# EAGLE board v0.3 (EAGLE 9.3.2)
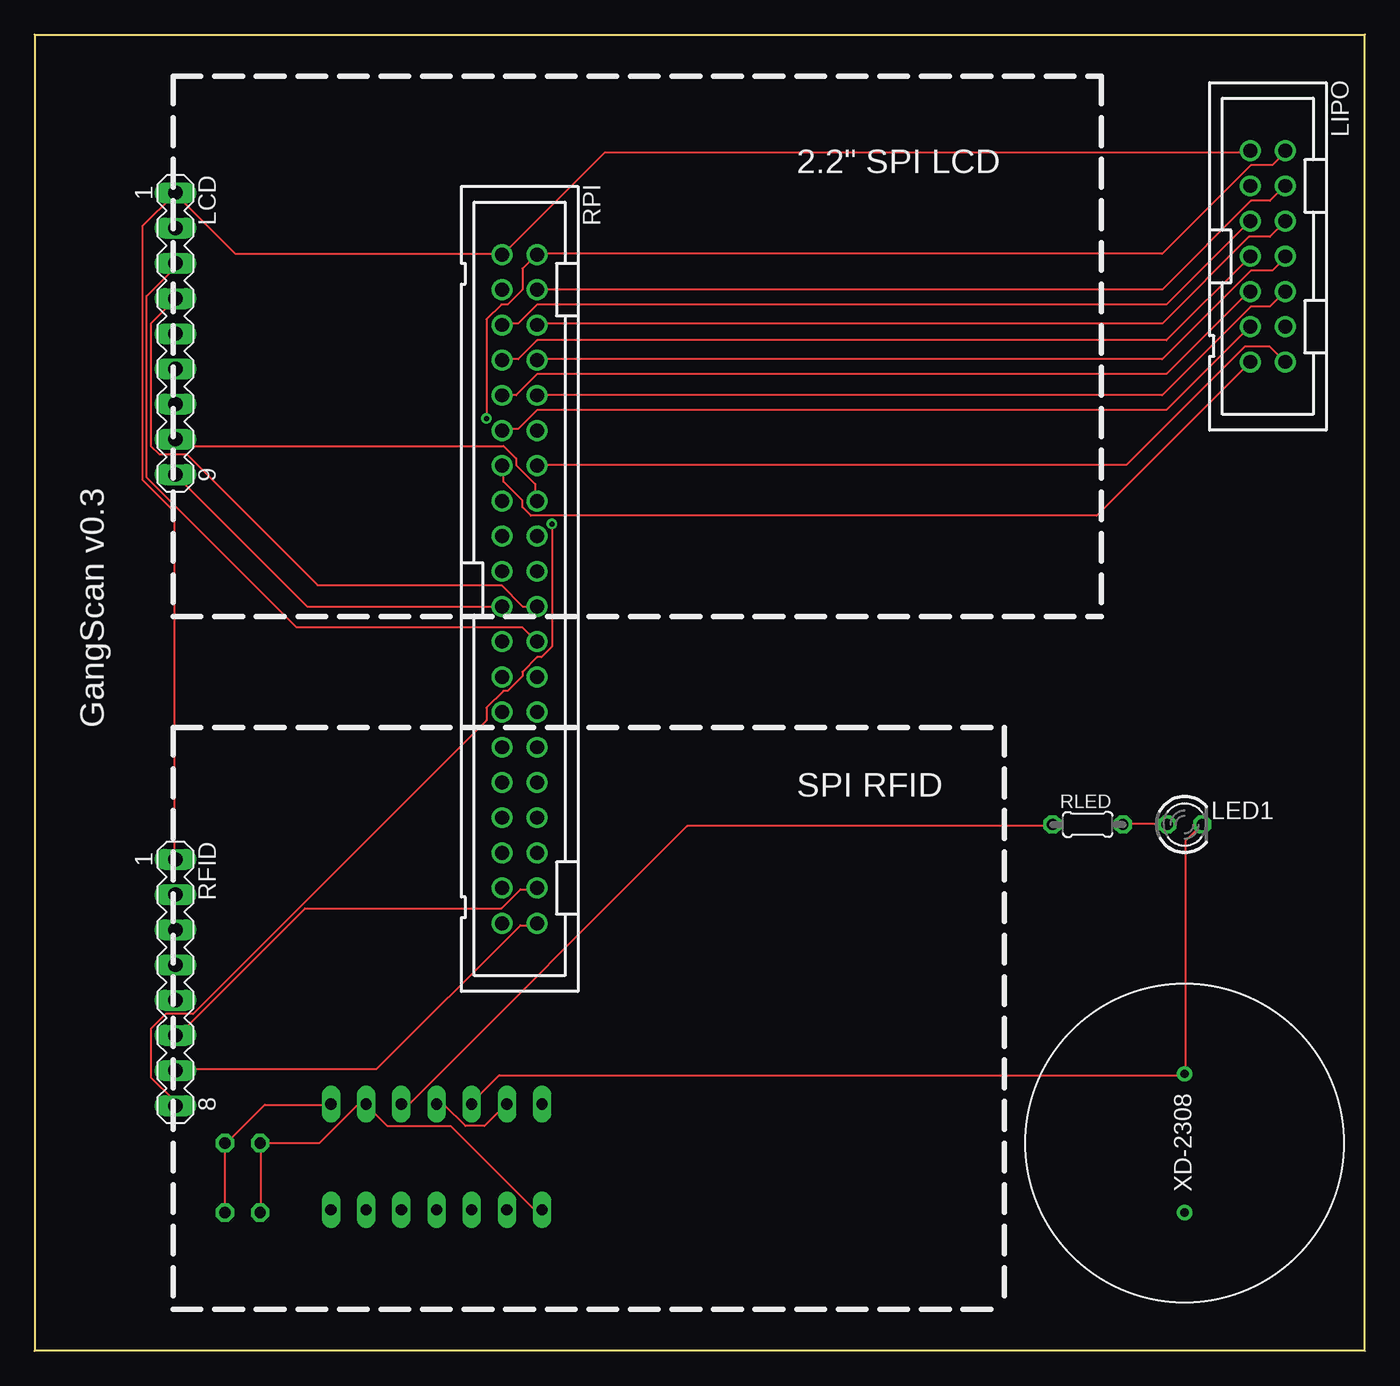
[diagram p0: board, top side]
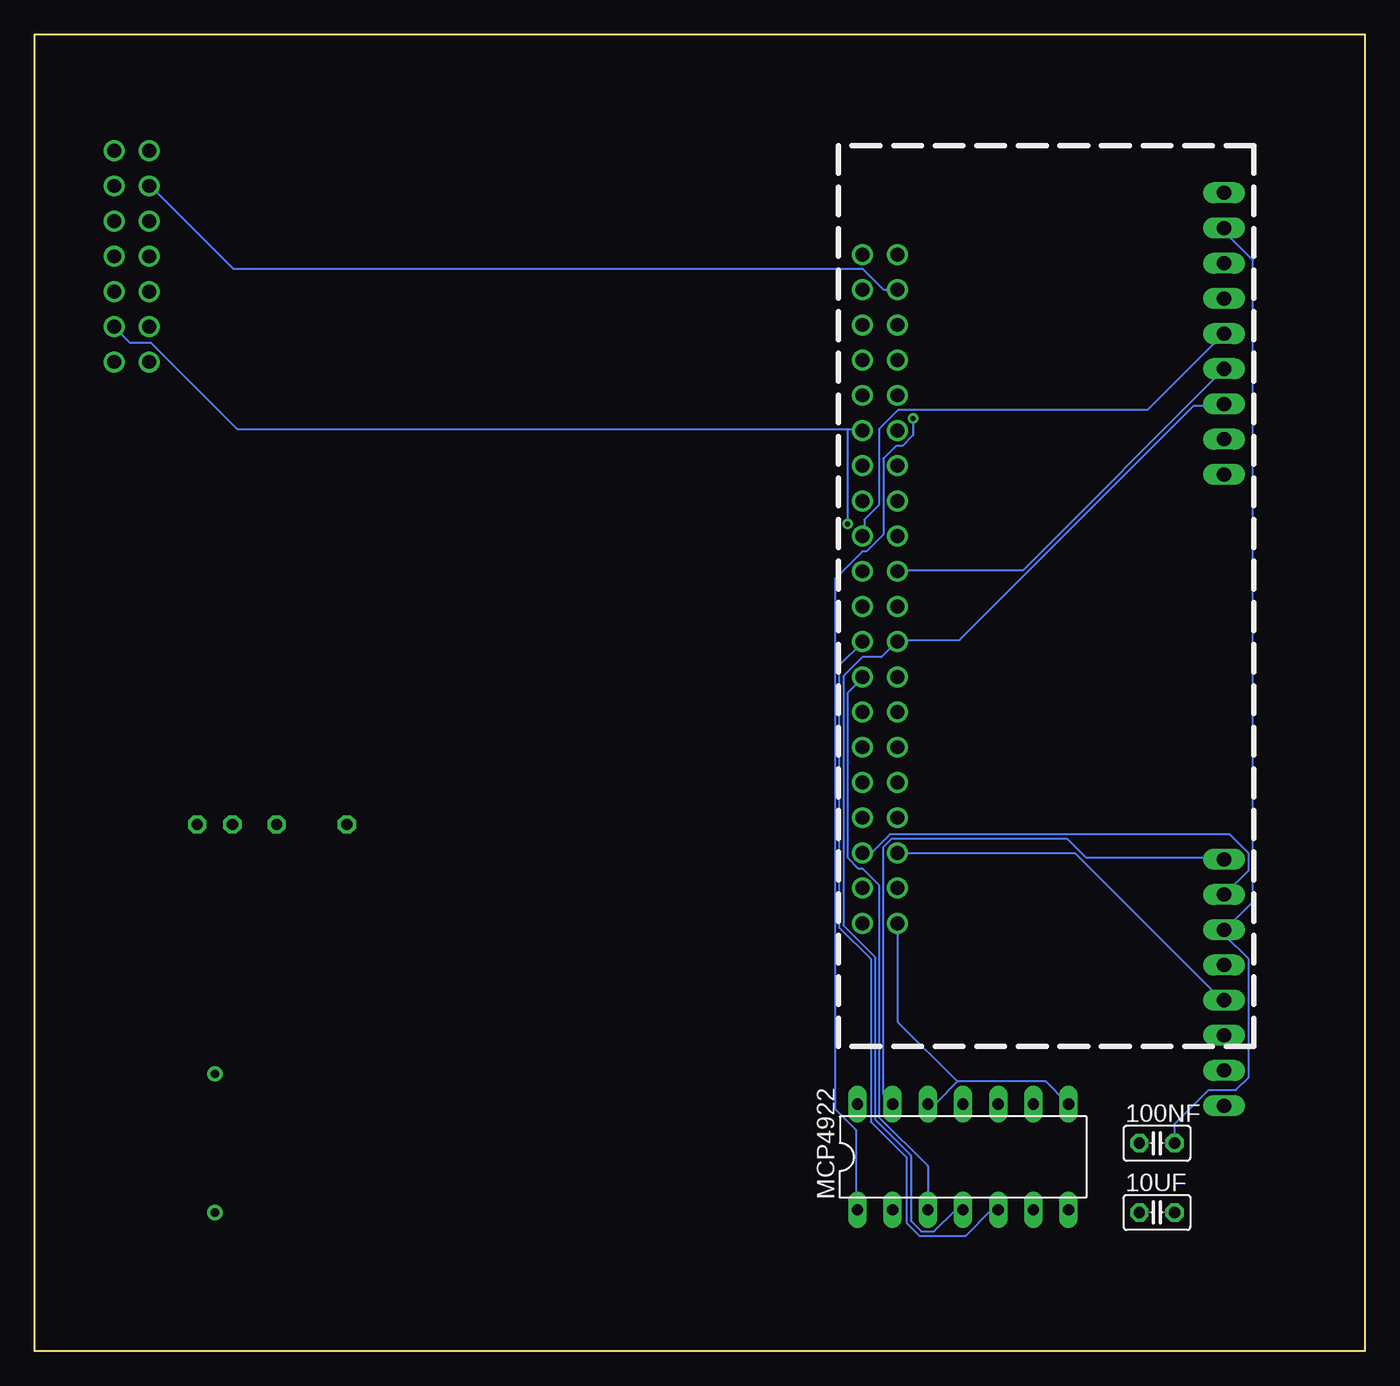
[diagram p1: board, bottom side, seen from below]

Size 96 x 95 mm. Coordinates in mm from the lower left corner, seen from the top.
Outline: 0,95 96,95 96,0 0,0 0,95
Copper layers (1*16): Top 0.035mm / dielectric 1.5mm / Bottom 0.035mm
Design rules "default": minimum track width 6mil, minimum drill 0.35mm, track to track 6mil, track to pad 6mil, pad to pad 6mil, via to via 6mil, smd to smd 6mil, copper to edge 40mil, drill to drill 6mil, minimum pad ring 10mil, minimum via ring 8mil, stop-mask expansion 4mil, vias tented up to drill 0mil, thermal gap 10mil

## Footprints (pad centres in the part's own frame; a part is rotated, then mirrored left to right if it is on the bottom)
C025-025X050 = drill 0.813 octagon: 1 -1.27,0; 2 1.27,0
MA09-1 = drill 1.016 long: 1 -10.16,0; 2 -7.62,0; 3 -5.08,0; 4 -2.54,0; 5 0,0; 6 2.54,0; 7 5.08,0; 8 7.62,0; 9 10.16,0
LED3MM = drill 0.813 octagon: A -1.27,0; K 1.27,0
PAK100/2500-14 = drill 1 pad 1.422: 1 -7.62,-1.27; 2 -7.62,1.27; 3 -5.08,-1.27; 4 -5.08,1.27; 5 -2.54,-1.27; 6 -2.54,1.27; 7 0,-1.27; 8 0,1.27; 9 2.54,-1.27; 10 2.54,1.27; 11 5.08,-1.27; 12 5.08,1.27; 13 7.62,-1.27; 14 7.62,1.27
DIL14 = drill 0.813 long: 1 -7.62,-3.81; 2 -5.08,-3.81; 3 -2.54,-3.81; 4 0,-3.81; 5 2.54,-3.81; 6 5.08,-3.81; 7 7.62,-3.81; 8 7.62,3.81; 9 5.08,3.81; 10 2.54,3.81; 11 0,3.81; 12 -2.54,3.81; 13 -5.08,3.81; 14 -7.62,3.81
MA08-1 = drill 1.016 long: 1 -8.89,0; 2 -6.35,0; 3 -3.81,0; 4 -1.27,0; 5 1.27,0; 6 3.81,0; 7 6.35,0; 8 8.89,0
0204/5 = drill 0.813 octagon: 1 -2.54,0; 2 2.54,0
PAK100/2500-40 = drill 1 pad 1.422: 1 -24.13,-1.27; 2 -24.13,1.27; 3 -21.59,-1.27; 4 -21.59,1.27; 5 -19.05,-1.27; 6 -19.05,1.27; 7 -16.51,-1.27; 8 -16.51,1.27; 9 -13.97,-1.27; 10 -13.97,1.27; 11 -11.43,-1.27; 12 -11.43,1.27; 13 -8.89,-1.27; 14 -8.89,1.27; 15 -6.35,-1.27; 16 -6.35,1.27; 17 -3.81,-1.27; 18 -3.81,1.27; 19 -1.27,-1.27; 20 -1.27,1.27; 21 1.27,-1.27; 22 1.27,1.27; 23 3.81,-1.27; 24 3.81,1.27; 25 6.35,-1.27; 26 6.35,1.27; 27 8.89,-1.27; 28 8.89,1.27; 29 11.43,-1.27; 30 11.43,1.27; 31 13.97,-1.27; 32 13.97,1.27; 33 16.51,-1.27; 34 16.51,1.27; 35 19.05,-1.27; 36 19.05,1.27; 37 21.59,-1.27; 38 21.59,1.27; 39 24.13,-1.27; 40 24.13,1.27
XD-2308-01-R = drill 0.6: + 0,0; - 10,0

## Placement (x,y rotation side)
10UF  [C025-025X050]  15,10 0 bottom
100NF  [C025-025X050]  15,15 0 bottom
LCD  [MA09-1]  10.16,73.42 270 top
LED1  [LED3MM]  83,38 0 top
LIPO  2514-  [PAK100/2500-14]  89,79 270 top
MCP4922  [DIL14]  29,14 0 bottom
RFID  [MA08-1]  10.16,26.59 270 top
RLED  [0204/5]  76,38 0 top
RPI  2540-  [PAK100/2500-40]  35,55 270 top
U$1  XD-2308-01-R  [XD-2308-01-R]  83,10 90 top

## Library data of the parts
10UF 100NF = rcl; SPICEPREFIX: C
LCD RFID = con-lstb; OC_FARNELL: unknown; OC_NEWARK: unknown
LED1 = led
LIPO RPI = con-3m; OC_FARNELL: unknown; OC_NEWARK: unknown
MCP4922 = ic-package
RLED = rcl; SPICEPREFIX: R
U$1 = XD-2308-01-R speaker

## Nets
3.3V: LCD.1 LIPO.1 MCP4922.11 MCP4922.13 RFID.1 RPI.1
5V: 10UF.1 100NF.1 LIPO.2 MCP4922.1 MCP4922.9 RPI.2
GND: 10UF.2 100NF.2 LCD.2 LED1.K MCP4922.8 MCP4922.12 RFID.3 RPI.39 U$1.-
LOWBAT: LIPO.7 RPI.7
N$1: LIPO.3 RPI.3
N$2: LIPO.4 RPI.4
N$3: LIPO.5 RPI.5
N$4: LIPO.6 RPI.6
N$5: LIPO.8 RPI.8
N$6: LIPO.9 RPI.9
N$7: LIPO.10 RPI.10
N$8: LIPO.11 RPI.11
N$9: LIPO.13 RPI.13
N$10: MCP4922.10 RLED.1
N$11: LED1.A RLED.2
N$14: LIPO.14 RPI.14
SPI0_CS0: LCD.3 MCP4922.5 RPI.24
SPI0_DC_RS: LCD.5 RPI.18
SPI0_LED: LCD.8 RPI.16
SPI0_MISO: LCD.9 RPI.21
SPI0_MOSI: LCD.6 RPI.19
SPI0_RESET: LCD.4 RPI.22
SPI0_SCK: LCD.7 MCP4922.4 RPI.23
SPI1_CS: LIPO.12 RFID.8 RPI.12
SPI1_MISO: RFID.5 RPI.35
SPI1_MOSI: RFID.6 RPI.38
SPI1_RST: RFID.2 RPI.36
SPI1_SCK: RFID.7 RPI.40
SPIO_CS1: MCP4922.3 RPI.26

## Tracks (layer width: path | path; a pad name or v marks a point on that pad's centre or on a via)
3.3V
  Top 0.152: MCP4922.11 29.11,17.77 29.57,17.77 31.09,16.25 32.46,16.25 33.98,17.77 MCP4922.13 | LIPO.1 87.63,86.5 41.15,86.5 33.83,79.19 RPI.1 33.68,79.19 14.48,79.19 10.21,83.46 LCD.1 10.06,83.46 7.77,81.17 7.77,62.88 10.06,60.6 10.06,35.6 RFID.1
  Bottom 0.152: RFID.1 10.21,35.6 20.12,35.6 21.49,36.98 34.14,36.98 34.75,36.36 34.75,18.53 34.14,17.93 MCP4922.13
5V  (via drill 0.35)
  Top 0.152: 10UF.1 16.31,10 16.31,14.88 100NF.1 16.31,15.03 20.57,15.03 23.32,17.77 23.77,17.77 MCP4922.9 23.93,17.77 25.45,16.25 30.02,16.25 35.97,10.3 36.58,10.3 MCP4922.1 | LIPO.2 90.22,86.5 89.31,85.59 87.78,85.59 81.38,79.19 36.27,79.19 RPI.2 36.12,79.04 35.2,78.12 35.2,76.6 34.14,75.53 33.68,75.53 32.61,74.47 v32.61,67.3
  Bottom 0.152: v32.61,67.3 32.61,66.08 33.38,65.32 33.83,65.32 34.75,64.41 34.75,58.92 35.97,57.7 36.27,57.7 38.25,55.72 38.25,17.47 36.73,15.94 36.73,10.3 MCP4922.1
GND
  Top 0.152: LED1.K 84.12,37.89 83.06,36.82 83.06,20.06 U$1.- 82.91,19.91 33.53,19.91 31.55,17.93 MCP4922.12 | 10UF.2 13.72,10 13.72,14.88 100NF.2 13.87,15.03 16.61,17.77 21.34,17.77 MCP4922.8
  Bottom 0.152: 29.41,19.45 30.94,17.93 31.39,17.93 MCP4922.12 | 29.41,19.45 23.01,19.45 21.49,17.93 MCP4922.8 | 29.41,19.45 33.68,23.72 33.68,30.73 RPI.39 | 100NF.2 13.72,15.03 13.72,16.4 11.28,18.84 9.3,18.84 8.38,19.75 8.38,28.29 10.06,29.96 10.06,30.27 RFID.3 10.06,30.42 8.08,32.4 8.08,78.73 10.06,80.71 10.06,81.02 LCD.2
LOWBAT
  Top 0.152: RPI.7 33.83,71.57 34.9,71.57 36.27,72.94 81.69,72.94 87.63,78.89 LIPO.7
N$1
  Bottom 0.152: RPI.3 33.83,76.6 34.75,76.6 36.27,78.12 81.69,78.12 87.63,84.07 LIPO.3
N$2
  Top 0.152: RPI.4 81.38,76.6 87.78,83 89.15,83 90.22,84.07 LIPO.4
N$3
  Top 0.152: RPI.5 33.83,74.16 34.9,74.16 36.27,75.53 81.69,75.53 87.63,81.48 LIPO.5
N$4
  Top 0.152: RPI.6 36.27,74.16 81.38,74.16 87.63,80.41 89.15,80.41 90.22,81.48 LIPO.6
N$5
  Top 0.152: RPI.8 36.27,71.57 81.38,71.57 87.78,77.97 89.31,77.97 90.22,78.89 LIPO.8
N$6
  Top 0.152: RPI.9 33.83,68.98 34.75,68.98 36.27,70.5 81.69,70.5 87.63,76.45 LIPO.9
N$7
  Top 0.152: RPI.10 81.38,68.98 87.78,75.38 89.15,75.38 90.22,76.45 LIPO.10
N$8
  Top 0.152: RPI.11 33.83,66.54 34.9,66.54 36.27,67.91 81.69,67.91 87.63,73.86 LIPO.11
N$9
  Top 0.152: RPI.13 33.83,63.8 33.83,62.73 35.2,61.36 35.2,60.9 35.81,60.29 76.66,60.29 87.63,71.27 LIPO.13
N$10
  Top 0.152: MCP4922.10 26.52,17.93 27.13,17.93 47.09,37.89 73.46,37.89 RLED.1
N$11
  Top 0.152: RLED.2 78.64,38.04 81.69,38.04 LED1.A
N$14
  Top 0.152: RPI.14 36.27,63.95 78.79,63.95 87.33,72.48 89.15,72.48 90.22,71.42 LIPO.14
SPI0_CS0
  Top 0.152: LCD.3 10.06,78.43 10.06,78.12 8.08,76.14 8.08,63.03 18.9,52.22 35.2,52.22 36.12,51.3 RPI.24
  Bottom 0.152: MCP4922.5 26.52,10.15 26.98,10.15 28.8,8.32 32.16,8.32 33.07,9.24 33.07,13.96 35.66,16.55 35.66,28.29 37.95,30.57 37.95,49.47 36.27,51.15 RPI.24
SPI0_DC_RS
  Bottom 0.152: RPI.18 36.12,58.92 36.12,59.99 35.05,61.05 35.05,66.54 33.68,67.91 15.7,67.91 10.21,73.4 LCD.5
SPI0_LED
  Top 0.152: RPI.16 36.12,61.36 36.12,62.58 34.75,63.95 34.75,64.41 33.83,65.32 10.67,65.32 10.21,65.78 LCD.8
SPI0_MISO
  Top 0.152: RPI.21 33.68,53.74 19.66,53.74 10.21,63.19 LCD.9
SPI0_MOSI
  Bottom 0.152: RPI.19 33.68,56.33 24.69,56.33 10.21,70.81 LCD.6
SPI0_RESET
  Top 0.152: RPI.22 36.12,53.74 35.2,53.74 33.68,55.26 20.42,55.26 10.97,64.71 8.99,64.71 8.38,65.32 8.38,74.16 10.06,75.84 LCD.4
SPI0_SCK
  Bottom 0.152: MCP4922.4 29.11,10.15 29.57,10.15 31.09,8.63 32,8.63 32.77,9.39 32.77,14.12 35.36,16.71 35.36,28.44 37.64,30.73 37.64,48.71 36.27,50.08 34.9,50.08 33.83,51.15 RPI.23 33.68,51.3 29.26,51.3 12.34,68.22 10.21,68.22 LCD.7
SPI1_CS  (via drill 0.35)
  Top 0.152: v37.34,59.68 37.34,50.84 36.58,50.08 36.27,50.08 35.2,49.01 35.2,48.71 34.14,47.64 33.83,47.64 32.61,46.42 32.61,45.51 11.43,24.33 9.45,24.33 8.38,23.26 8.38,19.75 10.06,18.08 10.06,17.77 RFID.8
  Bottom 0.152: 37.34,66.54 81.38,66.54 87.63,72.79 89.15,72.79 90.22,73.86 LIPO.12 | 37.34,66.54 36.27,66.54 RPI.12 | 37.34,66.54 v37.34,59.68
SPI1_MISO
  Bottom 0.152: RPI.35 33.68,35.91 20.88,35.91 10.21,25.24 RFID.5
SPI1_MOSI
  Top 0.152: RPI.38 36.12,33.32 35.05,33.32 33.68,31.95 19.51,31.95 10.21,22.65 RFID.6
SPI1_RST
  Bottom 0.152: RPI.36 36.12,36.06 35.51,36.06 34.29,37.28 9.75,37.28 8.38,35.91 8.38,34.69 10.06,33.01 RFID.2
SPI1_SCK
  Top 0.152: RPI.40 36.12,30.73 35.05,30.73 24.69,20.36 10.21,20.36 RFID.7
SPIO_CS1
  Bottom 0.152: MCP4922.3 31.55,10.3 31.55,13.35 35.05,16.86 35.05,33.62 36.27,34.84 36.58,34.84 37.34,35.6 37.34,47.49 36.27,48.56 RPI.26

## Text on the board
tPlace: 2.2" SPI LCD | GangScan v0.3 | SPI RFID